# Altium PCB Carduino_Pi_v1_panel.PcbDoc
Units mm, origin at the board's own origin, x right, y up, seen from the top; angles counter-clockwise.
Board outline 192 x 300 mm, 2 copper layers (L1 [TOP], L2 [BOT]), stack 1.57 mm thick; 4 components, 0 nets, 8 pads, 0 vias.
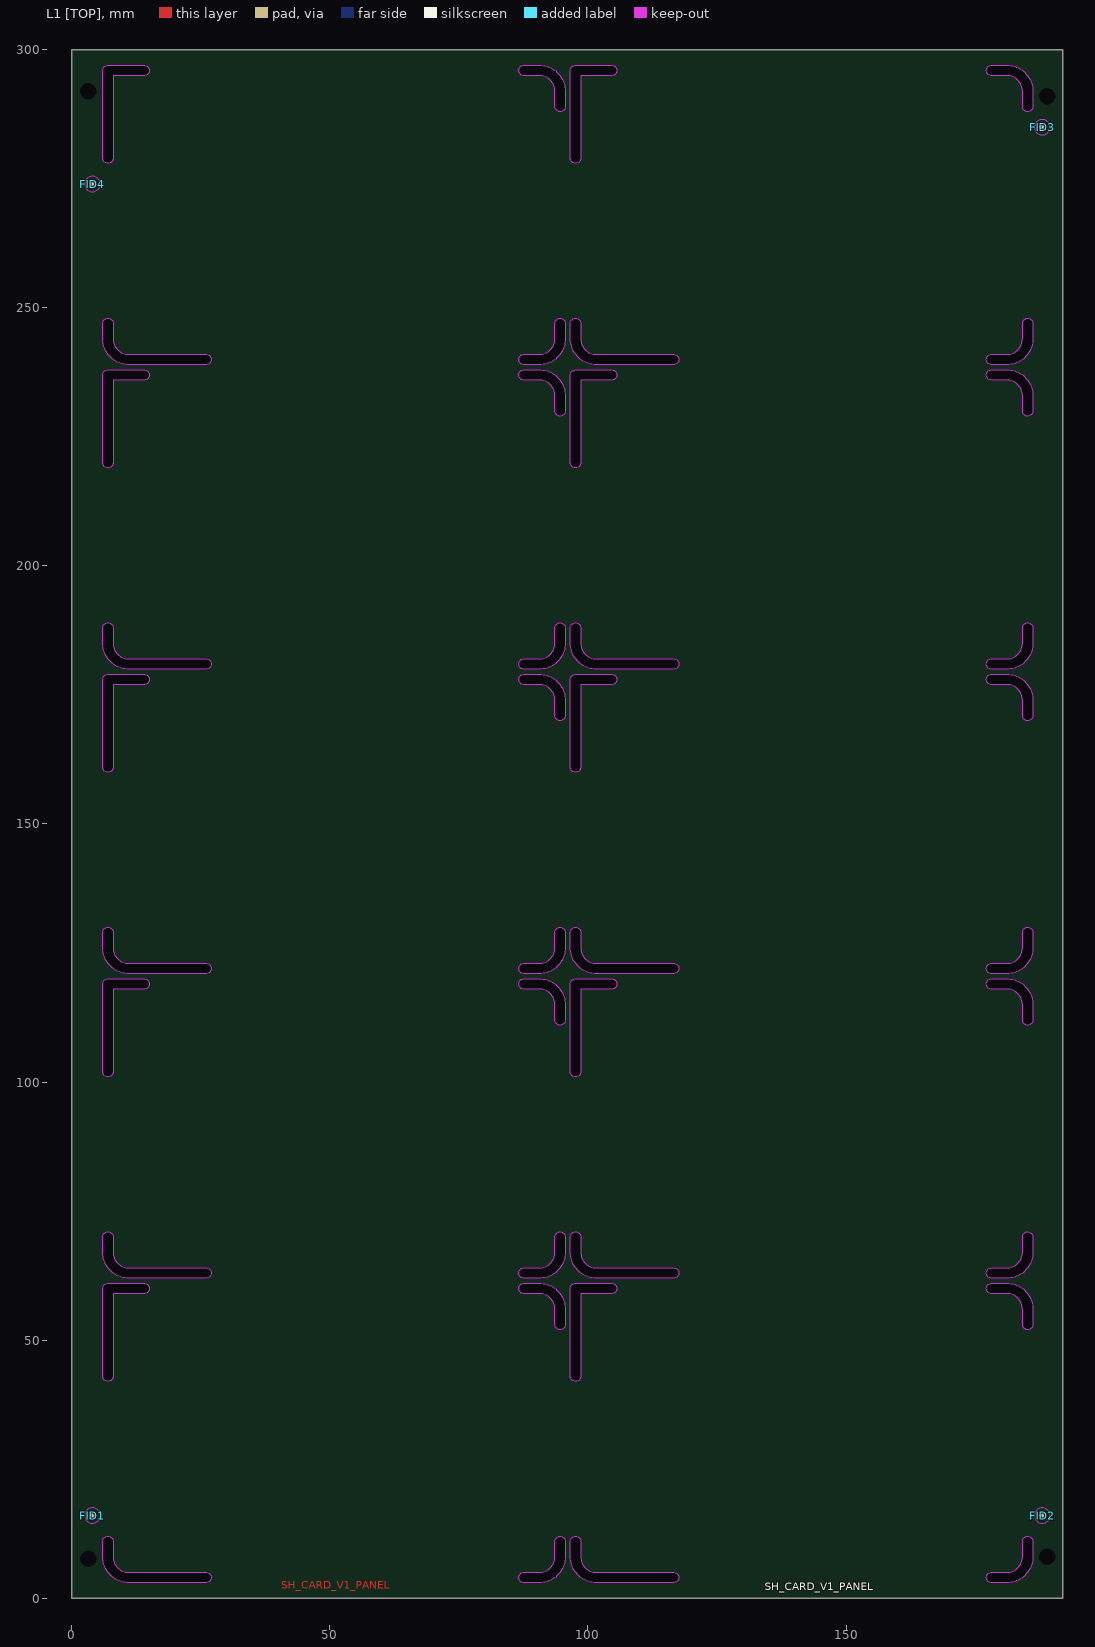
[diagram p0: L1 [TOP] view]
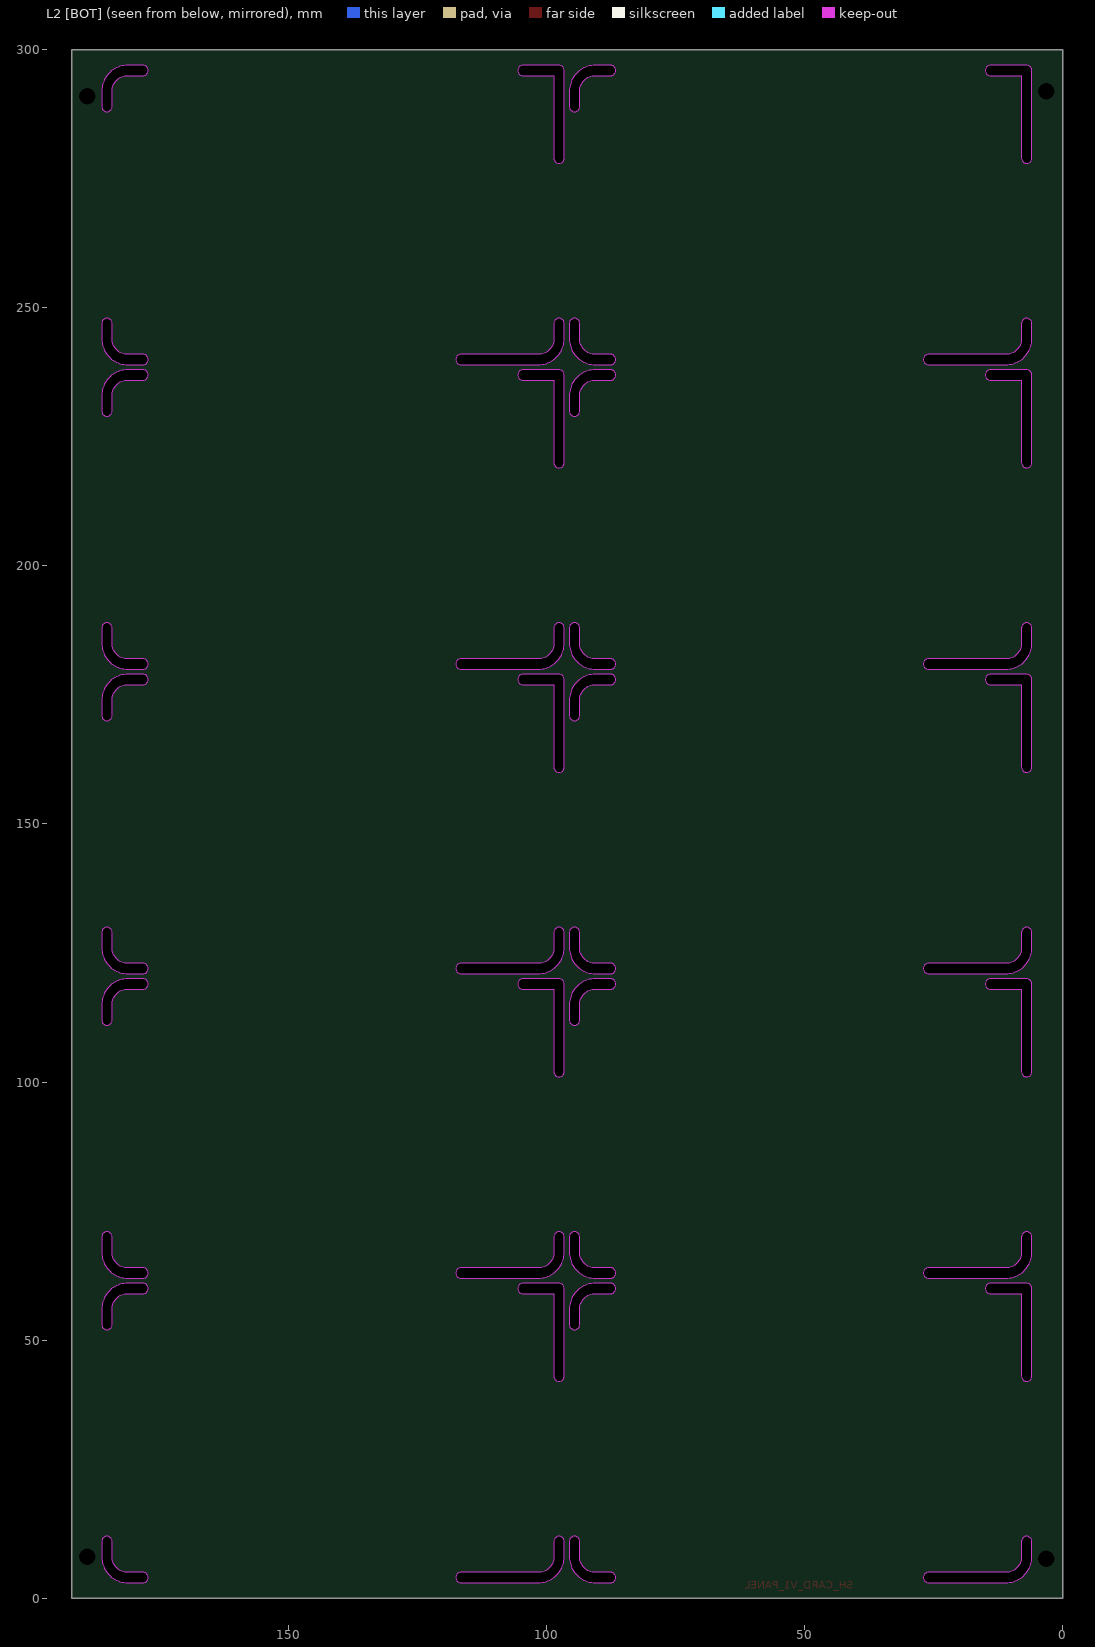
[diagram p1: L2 [BOT] view, seen from below]

## Layer stack, top to bottom
Soldermask [TOP]: solder mask 0.01, Solder Resist, Dk 3.5
L1 [TOP]: signal copper 0.035
Core: dielectric 1.5, FR-4, Dk 4.8
L2 [BOT]: signal copper 0.035
Soldermask [BOT]: solder mask 0.01, Solder Resist, Dk 3.5

## Board outline
0,0 0,300 192,300 192,0
cut-out: 6,244 6,247 cw(c7,247) 8,247 8,244 ccw(c11,244) 11,241 26,241 cw(c26,240) 27,240 cw(c26,240) 26,239 11,239 cw(c11,244)
cut-out: 96.6,244 96.6,247 cw(c97.6,247) 98.6,247 98.6,244 ccw(c101.6,244) 101.6,241 116.6,241 cw(c116.6,240) 117.6,240 cw(c116.6,240) 116.6,239 101.6,239 cw(c101.6,244)
cut-out: 87.6,239 cw(c87.6,240) 87.6,241 90.6,241 ccw(c90.6,244) 93.6,244 93.6,247 cw(c94.6,247) 95.6,247 95.6,244 cw(c90.6,244) 90.6,239
cut-out: 178.2,239 cw(c178.2,240) 178.2,241 181.2,241 ccw(c181.2,244) 184.2,244 184.2,247 cw(c185.2,247) 186.2,247 186.2,244 cw(c181.2,244) 181.2,239
cut-out: 178.2,295 cw(c178.2,296) 178.2,297 181.2,297 cw(c181.2,292) 186.2,292 186.2,289 cw(c185.2,289) 184.2,289 184.2,292 ccw(c181.2,292) 181.2,295
cut-out: 96.6,279 96.6,296 cw(c97.6,296) 97.6,297 104.6,297 cw(c104.6,296) 105.6,296 cw(c104.6,296) 104.6,295 98.6,295 98.6,279 cw(c97.6,279)
cut-out: 87.6,295 cw(c87.6,296) 87.6,297 90.6,297 cw(c90.6,292) 95.6,292 95.6,289 cw(c94.6,289) 93.6,289 93.6,292 ccw(c90.6,292) 90.6,295
cut-out: 6,279 6,296 cw(c7,296) 7,297 14,297 cw(c14,296) 15,296 cw(c14,296) 14,295 8,295 8,279 cw(c7,279)
cut-out: 6,185 6,188 cw(c7,188) 8,188 8,185 ccw(c11,185) 11,182 26,182 cw(c26,181) 27,181 cw(c26,181) 26,180 11,180 cw(c11,185)
cut-out: 96.6,185 96.6,188 cw(c97.6,188) 98.6,188 98.6,185 ccw(c101.6,185) 101.6,182 116.6,182 cw(c116.6,181) 117.6,181 cw(c116.6,181) 116.6,180 101.6,180 cw(c101.6,185)
cut-out: 87.6,180 cw(c87.6,181) 87.6,182 90.6,182 ccw(c90.6,185) 93.6,185 93.6,188 cw(c94.6,188) 95.6,188 95.6,185 cw(c90.6,185) 90.6,180
cut-out: 178.2,180 cw(c178.2,181) 178.2,182 181.2,182 ccw(c181.2,185) 184.2,185 184.2,188 cw(c185.2,188) 186.2,188 186.2,185 cw(c181.2,185) 181.2,180
cut-out: 178.2,236 cw(c178.2,237) 178.2,238 181.2,238 cw(c181.2,233) 186.2,233 186.2,230 cw(c185.2,230) 184.2,230 184.2,233 ccw(c181.2,233) 181.2,236
cut-out: 96.6,220 96.6,237 cw(c97.6,237) 97.6,238 104.6,238 cw(c104.6,237) 105.6,237 cw(c104.6,237) 104.6,236 98.6,236 98.6,220 cw(c97.6,220)
cut-out: 87.6,236 cw(c87.6,237) 87.6,238 90.6,238 cw(c90.6,233) 95.6,233 95.6,230 cw(c94.6,230) 93.6,230 93.6,233 ccw(c90.6,233) 90.6,236
cut-out: 6,220 6,237 cw(c7,237) 7,238 14,238 cw(c14,237) 15,237 cw(c14,237) 14,236 8,236 8,220 cw(c7,220)
cut-out: 6,126 6,129 cw(c7,129) 8,129 8,126 ccw(c11,126) 11,123 26,123 cw(c26,122) 27,122 cw(c26,122) 26,121 11,121 cw(c11,126)
cut-out: 96.6,126 96.6,129 cw(c97.6,129) 98.6,129 98.6,126 ccw(c101.6,126) 101.6,123 116.6,123 cw(c116.6,122) 117.6,122 cw(c116.6,122) 116.6,121 101.6,121 cw(c101.6,126)
cut-out: 87.6,121 cw(c87.6,122) 87.6,123 90.6,123 ccw(c90.6,126) 93.6,126 93.6,129 cw(c94.6,129) 95.6,129 95.6,126 cw(c90.6,126) 90.6,121
cut-out: 178.2,121 cw(c178.2,122) 178.2,123 181.2,123 ccw(c181.2,126) 184.2,126 184.2,129 cw(c185.2,129) 186.2,129 186.2,126 cw(c181.2,126) 181.2,121
cut-out: 178.2,177 cw(c178.2,178) 178.2,179 181.2,179 cw(c181.2,174) 186.2,174 186.2,171 cw(c185.2,171) 184.2,171 184.2,174 ccw(c181.2,174) 181.2,177
cut-out: 96.6,161 96.6,178 cw(c97.6,178) 97.6,179 104.6,179 cw(c104.6,178) 105.6,178 cw(c104.6,178) 104.6,177 98.6,177 98.6,161 cw(c97.6,161)
cut-out: 87.6,177 cw(c87.6,178) 87.6,179 90.6,179 cw(c90.6,174) 95.6,174 95.6,171 cw(c94.6,171) 93.6,171 93.6,174 ccw(c90.6,174) 90.6,177
cut-out: 6,161 6,178 cw(c7,178) 7,179 14,179 cw(c14,178) 15,178 cw(c14,178) 14,177 8,177 8,161 cw(c7,161)
cut-out: 6,67 6,70 cw(c7,70) 8,70 8,67 ccw(c11,67) 11,64 26,64 cw(c26,63) 27,63 cw(c26,63) 26,62 11,62 cw(c11,67)
cut-out: 96.6,67 96.6,70 cw(c97.6,70) 98.6,70 98.6,67 ccw(c101.6,67) 101.6,64 116.6,64 cw(c116.6,63) 117.6,63 cw(c116.6,63) 116.6,62 101.6,62 cw(c101.6,67)
cut-out: 87.6,62 cw(c87.6,63) 87.6,64 90.6,64 ccw(c90.6,67) 93.6,67 93.6,70 cw(c94.6,70) 95.6,70 95.6,67 cw(c90.6,67) 90.6,62
cut-out: 178.2,62 cw(c178.2,63) 178.2,64 181.2,64 ccw(c181.2,67) 184.2,67 184.2,70 cw(c185.2,70) 186.2,70 186.2,67 cw(c181.2,67) 181.2,62
cut-out: 178.2,118 cw(c178.2,119) 178.2,120 181.2,120 cw(c181.2,115) 186.2,115 186.2,112 cw(c185.2,112) 184.2,112 184.2,115 ccw(c181.2,115) 181.2,118
cut-out: 96.6,102 96.6,119 cw(c97.6,119) 97.6,120 104.6,120 cw(c104.6,119) 105.6,119 cw(c104.6,119) 104.6,118 98.6,118 98.6,102 cw(c97.6,102)
cut-out: 87.6,118 cw(c87.6,119) 87.6,120 90.6,120 cw(c90.6,115) 95.6,115 95.6,112 cw(c94.6,112) 93.6,112 93.6,115 ccw(c90.6,115) 90.6,118
cut-out: 6,102 6,119 cw(c7,119) 7,120 14,120 cw(c14,119) 15,119 cw(c14,119) 14,118 8,118 8,102 cw(c7,102)
cut-out: 6,43 6,60 cw(c7,60) 7,61 14,61 cw(c14,60) 15,60 cw(c14,60) 14,59 8,59 8,43 cw(c7,43)
cut-out: 87.6,59 cw(c87.6,60) 87.6,61 90.6,61 cw(c90.6,56) 95.6,56 95.6,53 cw(c94.6,53) 93.6,53 93.6,56 ccw(c90.6,56) 90.6,59
cut-out: 96.6,43 96.6,60 cw(c97.6,60) 97.6,61 104.6,61 cw(c104.6,60) 105.6,60 cw(c104.6,60) 104.6,59 98.6,59 98.6,43 cw(c97.6,43)
cut-out: 178.2,59 cw(c178.2,60) 178.2,61 181.2,61 cw(c181.2,56) 186.2,56 186.2,53 cw(c185.2,53) 184.2,53 184.2,56 ccw(c181.2,56) 181.2,59
cut-out: 178.2,3 cw(c178.2,4) 178.2,5 181.2,5 ccw(c181.2,8) 184.2,8 184.2,11 cw(c185.2,11) 186.2,11 186.2,8 cw(c181.2,8) 181.2,3
cut-out: 87.6,3 cw(c87.6,4) 87.6,5 90.6,5 ccw(c90.6,8) 93.6,8 93.6,11 cw(c94.6,11) 95.6,11 95.6,8 cw(c90.6,8) 90.6,3
cut-out: 96.6,8 96.6,11 cw(c97.6,11) 98.6,11 98.6,8 ccw(c101.6,8) 101.6,5 116.6,5 cw(c116.6,4) 117.6,4 cw(c116.6,4) 116.6,3 101.6,3 cw(c101.6,8)
cut-out: 6,8 6,11 cw(c7,11) 8,11 8,8 ccw(c11,8) 11,5 26,5 cw(c26,4) 27,4 cw(c26,4) 26,3 11,3 cw(c11,8)

## Design rules (kind name [scope] priority, off if disabled: settings)
Clearance [All] p1: gap=0.254 ignorepadtopadclearanceinfootprint=FALSE except(0: Arc-Hole Track-Hole SMDPad-Hole THPad-Hole Via-Hole Fill-Hole Poly-Hole Region-Hole Text-Hole)
PolygonConnect [All] p1: connectstyle=Relief reliefconductorwidth=0.254 reliefentries=4 polygonreliefangle="90 Angle" airgapwidth=0.254
RoutingVias [All] p1: holewidth=0.711 width=1.27 viastyle="Through Hole" minholewidth=0.711 minwidth=1.27 maxholewidth=0.711 maxwidth=1.27
SolderMaskExpansion [All] p1: expansion=0.102 istentingtop=FALSE
Width [All] p1: maxlimit=0.254 minlimit=0.254 preferedwidth=0.254
30 further rules are at their usual default settings.

## Components (designator, comment, footprint, x,y, rotation, side; value= is the part's Value field where it differs from the comment)
FID1 "Fiducial" PCB_FID_RND_100x300 4,16 r0 top
FID2 "Fiducial" PCB_FID_RND_100x300 188,16 r0 top (schematic designator FID1)
FID3 "Fiducial" PCB_FID_RND_100x300 188,285 r0 top (schematic designator FID1)
FID4 "Fiducial" PCB_FID_RND_100x300 4,274 r0 top (schematic designator FID1)

## Footprints (in the part's own frame and the unit in brackets; to place one, negate y for a bottom-side part, rotate by r counter-clockwise, add the part's x,y. Pads: shape width x height; smd on the part's side, far side on the other; paste and mask are expansions set on the pad)
PCB_FID_RND_100x300 [mm]
  round 1 smd paste-10 mask+1: 0(0,0)
  L1 [TOP] pour cut-out: -1.6,0 -1.478,-0.612 -1.131,-1.131 -0.612,-1.478 0,-1.6 0,-1.6 0.612,-1.478 1.131,-1.131 1.478,-0.612 1.6,0 1.6,0 1.478,0.612 1.131,1.131 0.612,1.478 0,1.6 0,1.6 -0.612,1.478 -1.131,1.131 -1.478,0.612 -1.6,0
  L1 [TOP] keep-out circle w0.05: c0,0 r1.5

## Part data
FID1 FID2 FID3 FID4: library part PCB_FID_RND, "PCB Marking; Fiducial; Round;", Component Subtype=-, Component Type=Fiducial, Mounting Type=-, Supplier 1=LCSC, Supplier 2=Farnell, Supplier 3=Mouser

## Free pads (board coordinates)
  round 0 hole 3.2 unplated mask+0.1: 0(3.2,7.6) 1(189,8) 2(189,291) 3(3.2,292)

## Nets (pads, with @x,y where several pads share a name; then routed paths per layer and width w, separated by ;. In a path a pad name is that pad's centre, name@x,y a point inside that pad or via, vN(x,y) a via of type N, cw(c..) or ccw(c..) an arc to the next point about the centre after c; other vN are vias at no path point)
pads on no net: FID1.0 FID2.0 FID3.0 FID4.0

## Other copper
L1 [TOP]:
  text "SH_CARD_V1_PANEL" at 40.55,1.825 h1.5

## Silkscreen, mask and mechanical layers (free items; w line width, h text height)
Silkscreen [TOP]:
  text "SH_CARD_V1_PANEL" at 134.229,1.575 h1.5
M02 PanelOutline:
  drawing of 478 lines, arcs and shapes, not listed
M03 V-Cut:
  lines w0.2: 0,5 192,5 ; 0,59 192,59 ; 0,64 192,64 ; 0,118 192,118 ; 0,123 192,123 ; 0,177 192,177 ; 0,182 192,182 ; 0,236 192,236 ; 0,241 192,241 ; 0,295 192,295 ; 8,0 8,300 ; 93.6,0 93.6,300 ; 98.6,0 98.6,300 ; 184.2,0 184.2,300
M04 MillingNonPlated:
  lines w2: 7,11 7,8 ccw(c11,8) 11,4 26,4 ; 7,43 7,60 14,60 ; 7,70 7,67 ccw(c11,67) 11,63 26,63 ; 7,102 7,119 14,119 ; 7,129 7,126 ccw(c11,126) 11,122 26,122 ; 7,161 7,178 14,178 ; 7,188 7,185 ccw(c11,185) 11,181 26,181 ; 7,220 7,237 14,237 ; 7,247 7,244 ccw(c11,244) 11,240 26,240 ; 7,279 7,296 14,296 ; 87.6,4 90.6,4 ccw(c90.6,8) 94.6,8 94.6,11 ; 87.6,60 90.6,60 cw(c90.6,56) 94.6,56 94.6,53 ; 87.6,63 90.6,63 ccw(c90.6,67) 94.6,67 94.6,70 ; 87.6,119 90.6,119 cw(c90.6,115) 94.6,115 94.6,112 ; 87.6,122 90.6,122 ccw(c90.6,126) 94.6,126 94.6,129 ; 87.6,178 90.6,178 cw(c90.6,174) 94.6,174 94.6,171 ; 87.6,181 90.6,181 ccw(c90.6,185) 94.6,185 94.6,188 ; 87.6,237 90.6,237 cw(c90.6,233) 94.6,233 94.6,230 ; 87.6,240 90.6,240 ccw(c90.6,244) 94.6,244 94.6,247 ; 87.6,296 90.6,296 cw(c90.6,292) 94.6,292 94.6,289 ; 97.6,11 97.6,8 ccw(c101.6,8) 101.6,4 116.6,4 ; 97.6,43 97.6,60 104.6,60 ; 97.6,70 97.6,67 ccw(c101.6,67) 101.6,63 116.6,63 ; 97.6,102 97.6,119 104.6,119 ; 97.6,129 97.6,126 ccw(c101.6,126) 101.6,122 116.6,122 ; 97.6,161 97.6,178 104.6,178 ; 97.6,188 97.6,185 ccw(c101.6,185) 101.6,181 116.6,181 ; 97.6,220 97.6,237 104.6,237 ; 97.6,247 97.6,244 ccw(c101.6,244) 101.6,240 116.6,240 ; 97.6,279 97.6,296 104.6,296 ; 178.2,4 181.2,4 ccw(c181.2,8) 185.2,8 185.2,11 ; 178.2,60 181.2,60 cw(c181.2,56) 185.2,56 185.2,53 ; 178.2,63 181.2,63 ccw(c181.2,67) 185.2,67 185.2,70 ; 178.2,119 181.2,119 cw(c181.2,115) 185.2,115 185.2,112 ; 178.2,122 181.2,122 ccw(c181.2,126) 185.2,126 185.2,129 ; 178.2,178 181.2,178 cw(c181.2,174) 185.2,174 185.2,171 ; 178.2,181 181.2,181 ccw(c181.2,185) 185.2,185 185.2,188 ; 178.2,237 181.2,237 cw(c181.2,233) 185.2,233 185.2,230 ; 178.2,240 181.2,240 ccw(c181.2,244) 185.2,244 185.2,247 ; 178.2,296 181.2,296 cw(c181.2,292) 185.2,292 185.2,289

## Dimensions
192,0 to 192,300 on M10 Dimensions
0,0 to 192,0 on M10 Dimensions

## Panel: embedded boards
"Carduino_Pi_v1.PcbDoc" at 8,5, 5 rows x 2 columns, spacing 59 x 90.6, rotation 0